# Altium PCB V_15.PcbDoc
Units mm, origin at the board's own origin, x right, y up, seen from the top; angles counter-clockwise.
Board outline 152.4 x 101.6 mm, 2 copper layers (Top Layer, Bottom Layer); 6 components, 9 nets, 110 pads, 17 vias.
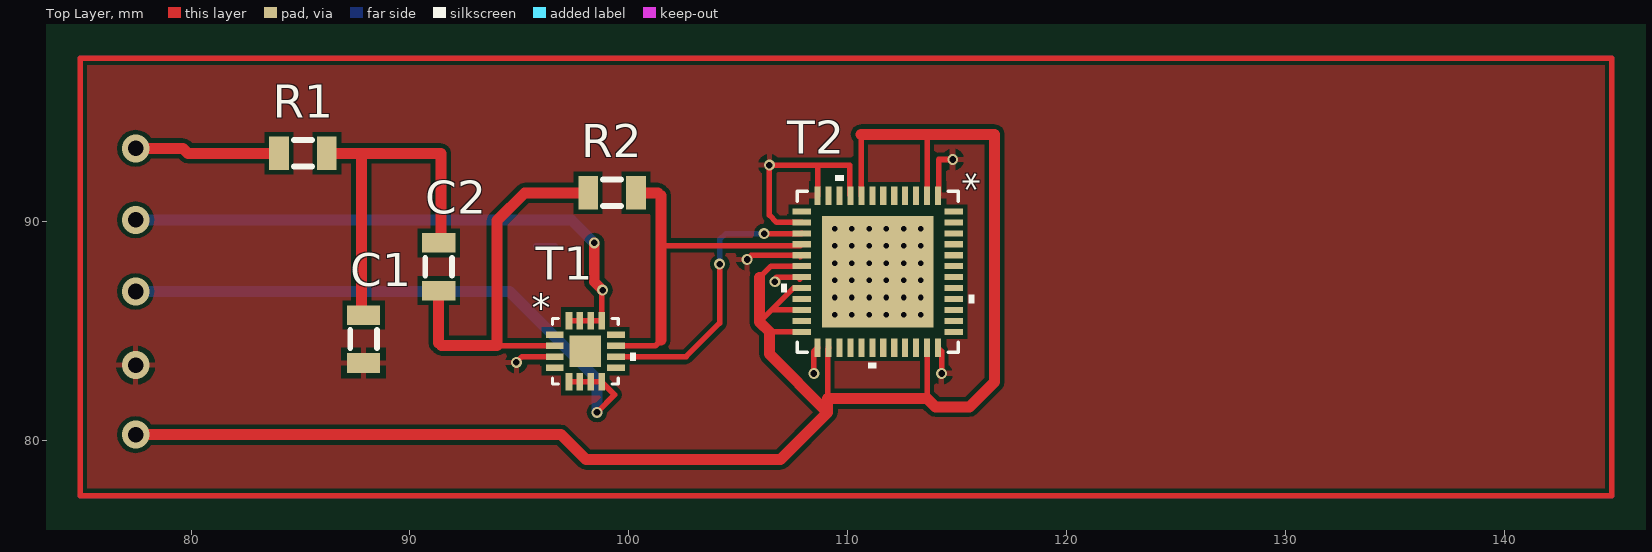
[diagram p0: Top Layer view]
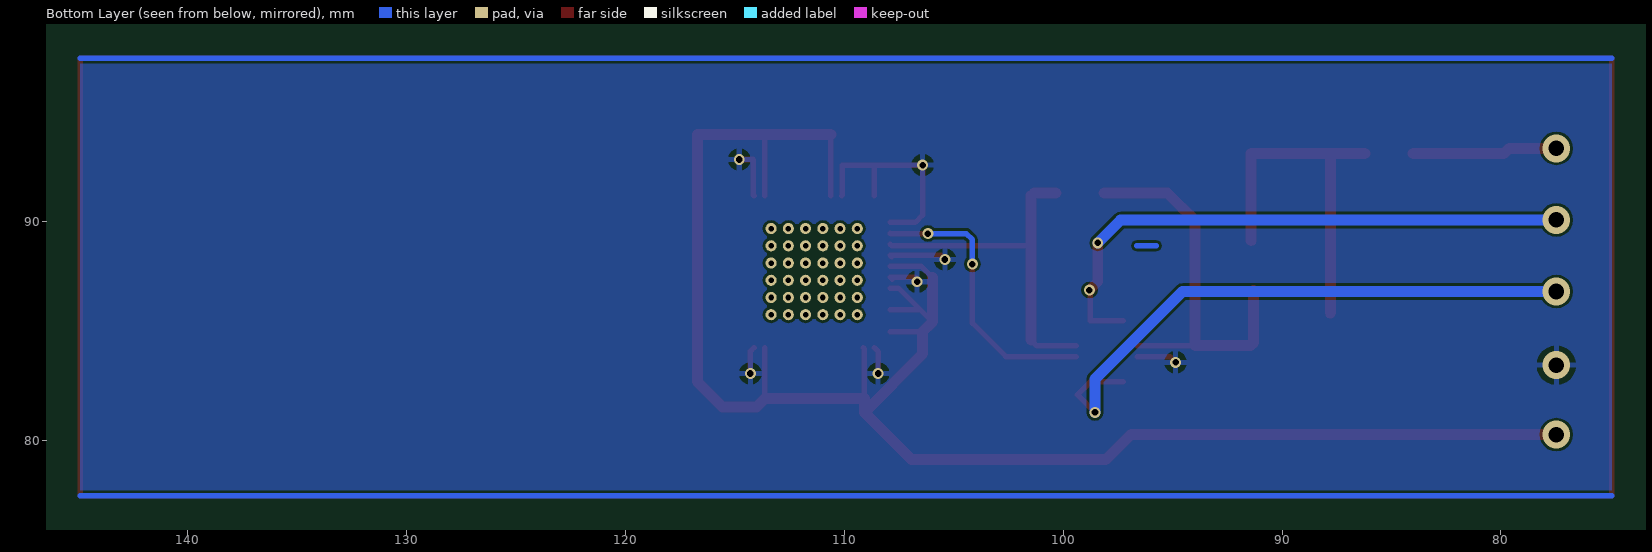
[diagram p1: Bottom Layer view, seen from below]

## Layer stack, top to bottom
Top Solder: solder mask 0.0102, Solder Resist, Dk 3.5
Top Layer: signal copper 0.0356
Dielectric 1: dielectric 0.32, FR-4, Dk 4.8
Bottom Layer: signal copper 0.0356
Bottom Solder: solder mask 0.0102, Solder Resist, Dk 3.5

## Board outline
25.4,25.4 177.8,25.4 177.8,127 25.4,127

## Design rules (kind name [scope] priority, off if disabled: settings)
Clearance [All] p1: gap=0.12 ignorepadtopadclearanceinfootprint=TRUE
PolygonConnect [All] p1: connectstyle=Relief reliefconductorwidth=0.254 reliefentries=4 polygonreliefangle="90 Angle" airgapwidth=0.254
RoutingCorners [All] p1: cornerstyle=45-Degree minsetback=0.12 maxsetback=2.54
RoutingVias [All] p1: holewidth=0.711 width=1.27 viastyle="Through Hole" minholewidth=0.3 minwidth=0.5 maxholewidth=0.711 maxwidth=1.27
ShortCircuit [All] p1: allowed=TRUE
SolderMaskExpansion [All] p1: expansion=0.102
UnpouredPolygon [All] p1: allowunpoured=TRUE allowshelved=TRUE
Width [All] p1: maxlimit=2 minlimit=0.12 preferedwidth=0.5
27 further rules are at their usual default settings.

## Components (designator, comment, footprint, x,y, rotation, side; value= is the part's Value field where it differs from the comment)
C1 "ADA4932" C 87.884,84.658 r90 top
C2 "ADA4932" C 91.313,87.909 r270 top
R1 "ADA4932" R 85.09,93.091 r0 top
R2 "ADA4932" R 99.212,91.288 r0 top
T1 "ADA4932" ADA4932 98.044,84.074 r0 top
T2 "ADA4932" ADS61B49 111.383,87.736 r270 top

## Footprints (in the part's own frame and the unit in brackets; to place one, negate y for a bottom-side part, rotate by r counter-clockwise, add the part's x,y. Pads: shape width x height; smd on the part's side, far side on the other; paste and mask are expansions set on the pad)
ADA4932 [mil]
  rect 32x12 smd mask+5: 1(-56,29.53) 2(-56,9.84) 3(-56,-9.84) 4(-56,-29.53) 9(54,-29.53) 10(54,-9.84) 11(54,9.84) 12(54,29.53)
  rect 12x32 smd mask+5: 5(-30.53,-55) 6(-10.84,-55) 7(8.84,-55) 8(28.53,-55) 13(28.53,55) 14(8.84,55) 15(-10.84,55) 16(-30.53,55)
  rect 57x57 smd mask-28: 17(-1,0)
  silkscreen extent -60,-59 90,59, body extent -1,0 -1,0
ADS61B49 [mil]
  rect 33.46x11.02 smd paste-5.51: 1(-135.81,108.27) 2(-135.81,88.58) 3(-135.81,68.9) 4(-135.81,49.21) 5(-135.81,29.53) 6(-135.81,9.84) 7(-135.81,-9.84) 8(-135.81,-29.53) 9(-135.81,-49.21) 10(-135.81,-68.9) 11(-135.81,-88.58) 12(-135.81,-108.27) 25(137.81,-108.27) 26(137.81,-88.58) 27(137.81,-68.9) 28(137.81,-49.21) 29(137.81,-29.53) 30(137.81,-9.84) 31(137.81,9.84) 32(137.81,29.53) 33(137.81,49.21) 34(137.81,68.9) 35(137.81,88.58) 36(137.81,108.27)
  rect 11.02x33.46 smd paste-5.51: 13(-107.3,-136.81) 14(-87.6,-136.81) 15(-67.91,-136.81) 16(-48.23,-136.81) 17(-28.54,-136.81) 18(-8.85,-136.81) 19(10.84,-136.81) 20(30.53,-136.81) 21(50.22,-136.81) 22(69.91,-136.81) 23(89.61,-136.81) 24(109.3,-136.81) 37(109.3,136.81) 38(89.6,136.81) 39(69.91,136.81) 40(50.22,136.81) 41(30.53,136.81) 42(10.84,136.81) 43(-8.85,136.81) 44(-28.54,136.81) 45(-48.23,136.81) 46(-67.91,136.81) 47(-87.61,136.81) 48(-107.3,136.81)
  rect 200.79x200.79 smd paste-99.89 mask-100: 49(1,0)
  round 20 / inner round 60 / far side round 20 hole 10: V(-76.5,46.5) V(-76.5,77.5) V(-76.5,-15.5) V(-76.5,15.5) V(-76.5,-77.5) V(-76.5,-46.5) V(-45.5,77.5) V(-45.5,46.5) V(-45.5,-15.5) V(-45.5,15.5) V(-45.5,-46.5) V(-45.5,-77.5) V(-14.5,77.5) V(-14.5,46.5) V(-14.5,15.5) V(-14.5,-15.5) V(-14.5,-46.5) V(-14.5,-77.5) V(16.5,77.5) V(16.5,46.5) V(16.5,15.5) V(16.5,-15.5) V(16.5,-46.5) V(16.5,-77.5) V(47.5,77.5) V(47.5,46.5) V(47.5,-15.5) V(47.5,15.5) V(47.5,-46.5) V(47.5,-77.5) V(78.5,46.5) V(78.5,77.5) V(78.5,-15.5) V(78.5,15.5) V(78.5,-77.5) V(78.5,-46.5)
  silkscreen extent -173,-174 175,174, body extent 1,0 1,0
C [mil]
  rect 35.43x60 smd: 1(-44,0) 2(42,0)
  silkscreen extent -17,-24 15,24
R [mil]
  rect 35.43x60 smd: 1(-42,1) 2(44,1)
  silkscreen extent -15,-23 17,25

## Part data
C1 C2: library part Capacitor
R1 R2: library part Resistor
T2: library part ADS61B49

## Via types
v1: diameter 0.5, hole 0.3, Top Layer to Bottom Layer, 12 vias
v2: diameter 1.27, hole 0.711, Top Layer to Bottom Layer, 5 vias

## Nets (pads, with @x,y where several pads share a name; then routed paths per layer and width w, separated by ;. In a path a pad name is that pad's centre, name@x,y a point inside that pad or via, vN(x,y) a via of type N, cw(c..) or ccw(c..) an arc to the next point about the centre after c; other vN are vias at no path point)
+3.3: T2.2 T2.8 T2.18 T2.20 T2.22 T2.24 T2.26 T2.35 | length 84.4
  Top Layer w0.254: 105.981,85.407 106.535,85.961 ; 105.981,87.439 106.503,87.961 T2.18 ; 106.426,84.963 107.905,84.963 T2.24 ; T2.22 106.535,85.961 ; T2.20 107.535,86.961 106.535,85.961 ; 109.093,81.915 109.093,84.196 T2.26 ; 110.617,93.98 110.617,91.202 T2.8 ; 113.633,82.074 T2.35 ; T2.2 113.633,93.948 113.665,93.98
  Top Layer w0.5: v2(77.47,80.264) 96.901,80.264 98.044,79.121 106.934,79.121 109.093,81.28 ; 105.981,87.439 105.981,85.407 106.426,84.963 106.426,83.947 109.093,81.28 ; 110.617,93.98 113.665,93.98 116.713,93.98 116.713,82.677 115.57,81.534 114.014,81.534 113.633,81.915 109.093,81.915 109.093,81.28
+5: T1.5 T1.6 T1.7 T1.8 | length 27.7
  Top Layer w0.254: T1.5 T1.6 T1.7 T1.8 99.359,82.087 v1(98.552,81.28)
  Bottom Layer w0.5: v2(77.47,86.804) 94.551,86.804 98.552,82.804 v1(98.552,81.28)
-5: T1.13 T1.14 T1.15 T1.16 | length 26.6
  Top Layer w0.254: T1.16 T1.15 T1.14 T1.13 v1@98.769,86.905
  Top Layer w0.5: v1(98.425,89.027) 98.425,87.249 v1@98.769,86.905
  Bottom Layer w0.5: v2(77.47,90.075) 97.377,90.075 v1(98.425,89.027)
  other v1: 98.806,86.868
C2-2_R2-1_T1-2: C2.2 R2.1 T1.2 | length 18.2
  Top Layer w0.254: 91.313,84.455 91.44,84.328 ; 93.98,84.328 96.618,84.328 T1.2
  Top Layer w0.5: 91.313,84.455 C2.2 ; 91.44,84.328 93.98,84.328 93.98,90.043 95.25,91.313 R2.1
GND: C1.1 T1.3 T2.1 T2.9 T2.12 T2.14 T2.17 T2.19 T2.25 T2.36 | length 21.1
  Top Layer w0.254: v1(94.869,83.566) 95.127,83.824 T1.3 T1.3@96.618,83.82 ; v1(105.41,88.265) 105.606,88.461 T2.17 T2.17@107.839,88.392 ; v1(106.68,87.249) 106.68,87.376 106.765,87.461 T2.19 T2.19@107.823,87.376 ; T2.14 106.761,89.962 106.426,90.297 v1(106.426,92.583) 108.585,92.583 ; v1(108.458,83.058) 108.458,84.061 T2.25 ; T2.12 108.633,92.535 108.585,92.583 ; T2.9 110.109,91.21 110.109,92.583 108.585,92.583 ; T2.36 114.3,84.069 v1@114.3,83.185 ; T2.1 114.173,91.226 114.173,92.837 v1(114.808,92.837)
  other v1: 114.3,83.058
  other v2: 77.47,83.439
In_R1-1: R1.1 | length 6.6
  Top Layer w0.5: v2(77.47,93.345) 79.629,93.345 79.858,93.116 R1.1
R1-2_C2-1_C1-1: C1.2 C2.1 R1.2 | length 16.8
  Top Layer w0.254: C1.2@87.782,85.827 C1.2 ; C2.1 C2.1@91.415,89.129
  Top Layer w0.5: R1.2 87.782,93.116 ; C1.2@87.782,85.827 87.782,93.116 ; C2.1@91.415,89.129 91.415,93.116 87.782,93.116
R2-2_T1-11_T2-16: R2.2 T1.11 T2.16 | length 16.4
  Top Layer w0.254: T1.11 101.215,84.324 101.473,84.582 ; 101.346,91.313 101.473,91.186 ; 101.473,88.9 107.847,88.9 T2.16
  Top Layer w0.5: R2.2 101.346,91.313 ; 101.473,84.582 101.473,88.9 101.473,91.186
T1-10_T2-15: T1.10 T2.15 | length 13.1
  Top Layer w0.254: T1.10 102.62,83.824 104.157,85.361 v1(104.157,88.054) ; v1(106.189,89.451) 107.897,89.451 T2.15
  Bottom Layer w0.254: v1(104.157,88.054) 104.157,89.171 104.437,89.451 v1(106.189,89.451)
pads on no net: T1.1 T1.4 T1.9 T1.12 T1.17 T2.3 T2.4 T2.5 T2.6 T2.7 T2.10 T2.11 T2.13 T2.21 T2.23 T2.27 T2.28 T2.29 T2.30 T2.31 T2.32 T2.33 T2.34 T2.37 T2.38 T2.39 T2.40 T2.41 T2.42 T2.43 T2.44 T2.45 T2.46 T2.47 T2.48 T2.49 T2.V
copper on no net: | length 41
  Top Layer w0.254: 74.93,77.47 74.93,97.47 ; 99.416,84.324 99.42,84.328 ; 107.823,87.376 107.908,87.461 ; 144.93,77.47 144.93,97.47
  Bottom Layer w0.254: 95.758,88.9 96.647,88.9

## Polygon pours and split planes (outlines as drawn)
GND on Top Layer "Top Layer-GND" (solid, pour order 20): 74.93,97.47 144.653,97.47 144.653,77.747 144.93,77.47 74.93,77.47
GND on Bottom Layer "Bottom Layer-GND" (solid, pour order 22): 74.93,97.47 144.93,97.47 144.93,77.47 74.93,77.47

## Other copper
Multi-Layer:
  lines w0.254: 74.93,77.47 144.93,77.47 ; 74.93,97.47 144.93,97.47

## Text inside footprints (layer, text, board x,y; h text height)
T1: Top Overlay "*" at 95.58,85.455 h1.27; Mechanical 13 "*" at 95.58,85.455 h1.27
T2: Top Overlay "*" at 114.764,92.246 h1.27 r270; Mechanical 13 "*" at 114.764,92.246 h1.27 r270